# EAGLE board led2 (EAGLE 6.3)
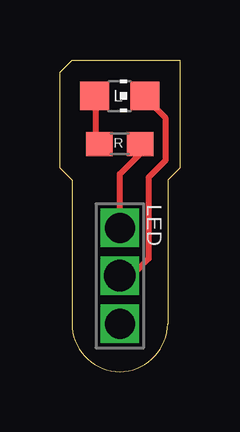
[diagram p0: board, top side]

Size 5 x 13 mm. Coordinates in mm from the lower left corner, seen from the top.
Outline: 2.5,0 arc90 4.5,2 4.5,8 5,8.5 5,13 0.5,13 0,12.5 0,8.5 0.5,8 0.5,2 arc90 2.5,0
Copper layers (1*16): Top 0.035mm / dielectric 1.5mm / Bottom 0.035mm
Design rules "default": minimum track width 10mil, minimum drill 24mil, track to track 8mil, track to pad 8mil, pad to pad 8mil, via to via 8mil, smd to smd 8mil, copper to edge 40mil, drill to drill 8mil, minimum pad ring 5mil, minimum via ring 8mil, stop-mask expansion 4mil, vias tented up to drill 0mil, thermal gap 10mil

## Footprints (pad centres in the part's own frame; a part is rotated, then mirrored left to right if it is on the bottom)
SENSOR_HEADER = drill 1.25 pad 1.6 square: 1 0,2; 3 0,-2 | drill 1.3 pad 1.6 square: 2 0,0
CHIP-LED0805 = smd 1.2 x 1.2: A 0,-1.05; C 0,1.05
0603 = smd 1.1 x 1: 1 -0.85,0; 2 0.85,0

## Placement (x,y rotation side)
E$2  [SENSOR_HEADER]  2.5,4 0 top
L  [CHIP-LED0805]  2.5,11.5 270 top
R  [0603]  2.5,9.5 180 top

## Library data of the parts
E$2 = appessory
L = led
R = SparkFun

## Nets
S$1: E$2.1
S$4: E$2.2

## Tracks (layer width: path | path; a pad name or v marks a point on that pad's centre or on a via)
S$1
  Top 0.254: E$2.1 2.5,8.25 3.5,9.25
S$3
  Top 0.254: 1.5,9.5 1.5,11.5
S$4
  Top 0.254: 3.75,11.25 4.4,10.6 4.4,8.8 3.7,8.1 3.7,4.7 3,4 E$2.2

## Text on the board
tPlace: LED